# EAGLE board Final_v2 (EAGLE 8.6.3)
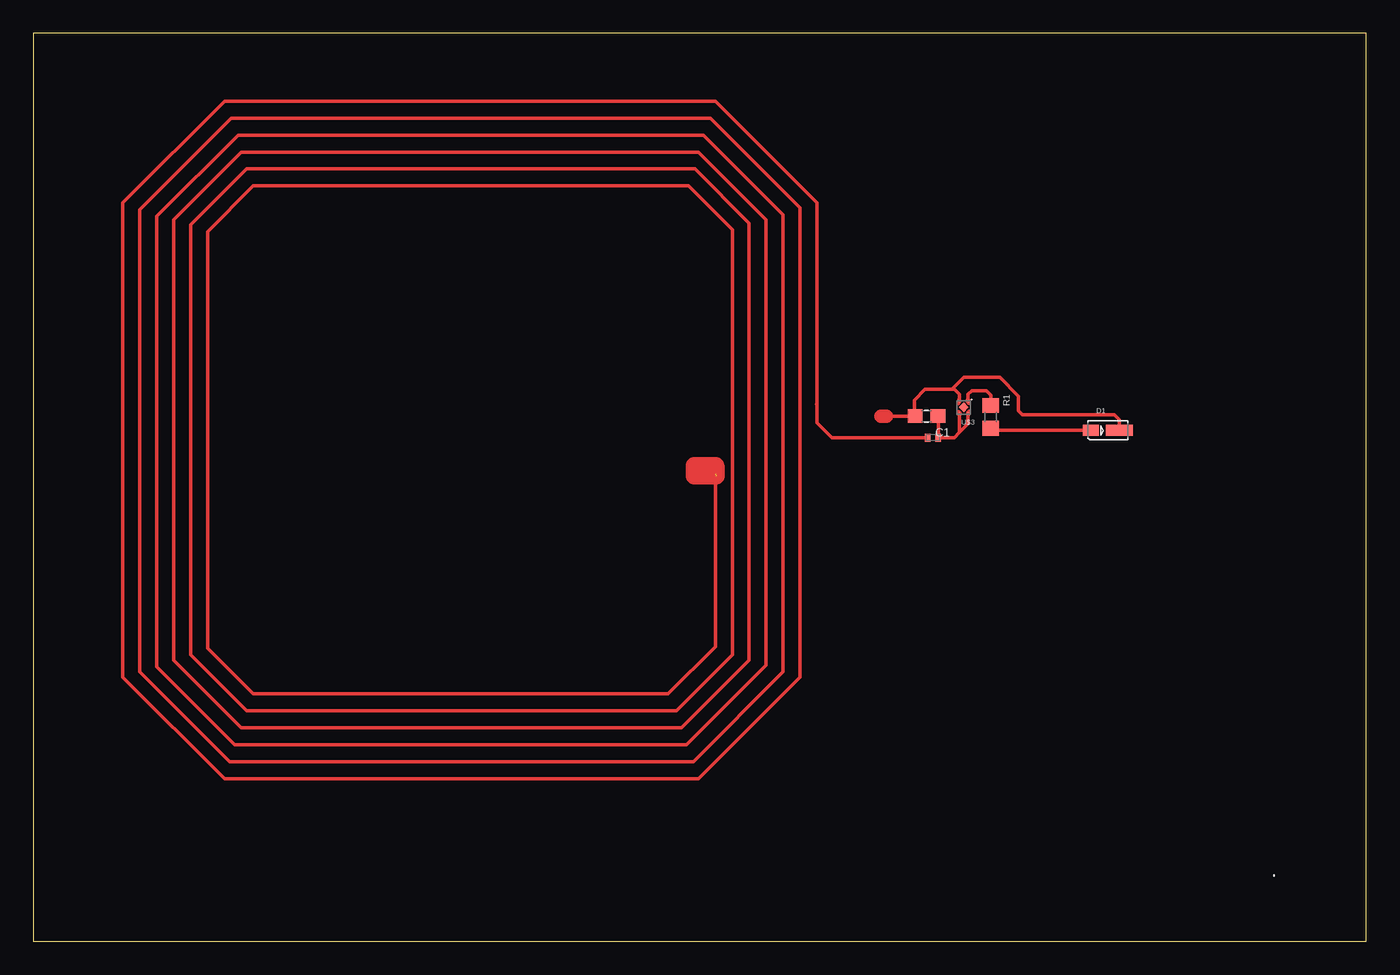
[diagram p0: board, top side]

Size 100 x 68.11 mm. Coordinates in mm from the lower left corner, seen from the top.
Outline: 0,0 100,0 100,68.11 0,68.11 0,0
Copper layers (1*16): Top 0.035mm / dielectric 1.5mm / Bottom 0.035mm
Design rules "default": minimum track width 6mil, minimum drill 0.35mm, track to track 6mil, track to pad 6mil, pad to pad 6mil, via to via 6mil, smd to smd 6mil, copper to edge 40mil, drill to drill 6mil, minimum pad ring 10mil, minimum via ring 8mil, stop-mask expansion 4mil, vias tented up to drill 0mil, thermal gap 10mil

## Footprints (pad centres in the part's own frame; a part is rotated, then mirrored left to right if it is on the bottom)
CAPC1608X90 = smd 1.1 x 1: 1 -0.85,0; 2 0.85,0
WL-SWTP_3014 = smd 2 x 0.8: 1 0.88,0 | smd 1.2 x 0.8: 2 -1.27,0
RESC1608X55 = smd 1.1 x 1.25: 1 -0.85,0; 2 0.85,0
0402_MURATA = smd 0.4 x 0.6: P$1 -0.4,0; P$2 0.4,0
REG_NCP160AMX180TBG = smd 0.1 x 0.1: 1 -0.325,-0.4; 2 0.325,-0.4; 3 0.325,0.4; 4 -0.325,0.4 | smd 0.52 x 0.52 rotated 45: 5 0,0

## Placement (x,y rotation side)
C1  06036D225KAT2A  [CAPC1608X90]  67.02,39.4 180 top
D1  WL-SWTP3014  [WL-SWTP_3014]  80.6,38.34 0 top
R1  CRCW06033K30FKEA  [RESC1608X55]  71.83,39.34 270 top
U$2  SCHOTTKY0402  [0402_MURATA]  67.49,37.79 0 top
U$3  NCP161_711AJ  [REG_NCP160AMX180TBG]  69.8,40.06 180 top

## Library data of the parts
C1 = Capacitor_2.2uF_0603; DESCRIPTION: 0603 2.2 uF 6.3 V ±10 % Tolerance X5R Surface Mount Multilayer Ceramic Capacitor; DIGI-KEY_PART_NUMBER: 478-1252-1-ND; DIGI-KEY_PURCHASE_URL: https://www.digikey.co.uk/product-detail/en/avx-corporation/06036D225KAT2A/478-1252-1-ND/564284?utm_source=snapeda&utm_medium=aggregator&utm_campaign=symbol; MF: AVX; MP: 06036D225KAT2A; PACKAGE: 0603 AVX
D1 = WL-SWTP; DESCRIPTION: SMD LED PLCC2 Daylight white 120 ° 3.2 V Wuerth Elektronik; DIGI-KEY_PART_NUMBER: 732-5661-1-ND; DIGI-KEY_PURCHASE_URL: https://www.digikey.co.uk/product-detail/en/wurth-electronics-inc/158301250/732-5661-1-ND/4947879?utm_source=snapeda&utm_medium=aggregator&utm_campaign=symbol; MF: Wurth Electronics; MP: 158301250; PACKAGE: 1206 Würth Elektronik
R1 = CRCW06033K30FKEA; DESCRIPTION: Res Thick Film 0603 3.3K Ohm 1% 0.1W_1/10W_ ?100ppm/C SMD Automotive Paper T/R; DIGI-KEY_PART_NUMBER: 541-3.30KHCT-ND; DIGI-KEY_PURCHASE_URL: https://www.digikey.com/product-detail/en/vishay-dale/CRCW06033K30FKEA/541-3.30KHCT-ND/1179866?utm_source=snapeda&utm_medium=aggregator&utm_campaign=symbol; MF: Vishay Dale; MP: CRCW06033K30FKEA; PACKAGE: 0603 Vishay
U$2 = Schottki_0402
U$3 = NCP160AMX180TBG

## Nets
GND: C1.2 D1.1 U$3.2
IN: C1.1 U$2.P$2 U$3.3 U$3.4
IN+: U$2.P$1
N$2: D1.2 R1.2
OUT: R1.1 U$3.1

## Tracks (layer width: path | path; a pad name or v marks a point on that pad's centre or on a via)
GND
  Top 0.254: U$3.2 69.47,41.02 69.1,41.4 68.9,41.4 | 68.9,41.4 66.9,41.4 66.1,40.6 66.1,39.47 C1.2 64,39.4 | D1.1 81.48,39.12 81.1,39.5 74.2,39.5 73.9,39.8 73.9,40.9 72.5,42.3 69.8,42.3 68.9,41.4
  Top 1.016: 64,39.4 63.6,39.4
GND1  (1 unrouted)
  Top 0.254: 54.98,37.62 54.98,54.12 49.9,59.2 15.61,59.2 10.53,54.12 10.53,21.11 15.61,16.02 48.63,16.02 53.71,21.11 53.71,53.87 49.65,57.94 15.99,57.94 11.8,53.74 11.8,21.49 15.99,17.3 48.25,17.3 52.44,21.49 52.44,53.36 49.14,56.66 16.5,56.66 13.07,53.24 13.07,21.99 16.5,18.57 47.62,18.57 51.17,22.12 51.17,35.08
  Top 1.27: 51.2,34.91 50.41,34.91 50.4,34.9 49.6,34.9 49.6,35.7 51.2,35.7 51.2,34.91 | 51.2,34.91 51.23,34.91
IN
  Top 0.254: U$3.4 70.12,38.83 69.47,38.17 | 69.47,38.17 69.09,37.79 U$2.P$2 67.89,39.38 C1.1 | U$3.3 69.47,38.17
IN+
  Top 0.254: 58.79,40.3 58.79,55.4 51.17,63.02 14.34,63.02 6.72,55.4 6.72,19.84 14.34,12.21 49.9,12.21 57.52,19.84 57.52,55.01 50.79,61.74 14.85,61.74 7.99,54.89 7.99,20.22 14.72,13.48 49.52,13.48 56.25,20.22 56.25,54.51 50.28,60.48 15.36,60.48 9.26,54.38 9.26,20.6 15.1,14.76 49.01,14.76 54.98,20.72 54.98,37.62 | 58.77,40.28 58.79,40.3 | 58.79,40.3 58.79,38.91 59.91,37.79 U$2.P$1
N$2
  Top 0.254: R1.2 71.99,38.33 72,38.34 D1.2
OUT
  Top 0.254: R1.1 71.83,40.97 71.5,41.3 70.4,41.3 70.12,41.02 U$3.1